# EAGLE board eagle_Ultrasonic sensor arduino (EAGLE 9.5.1)
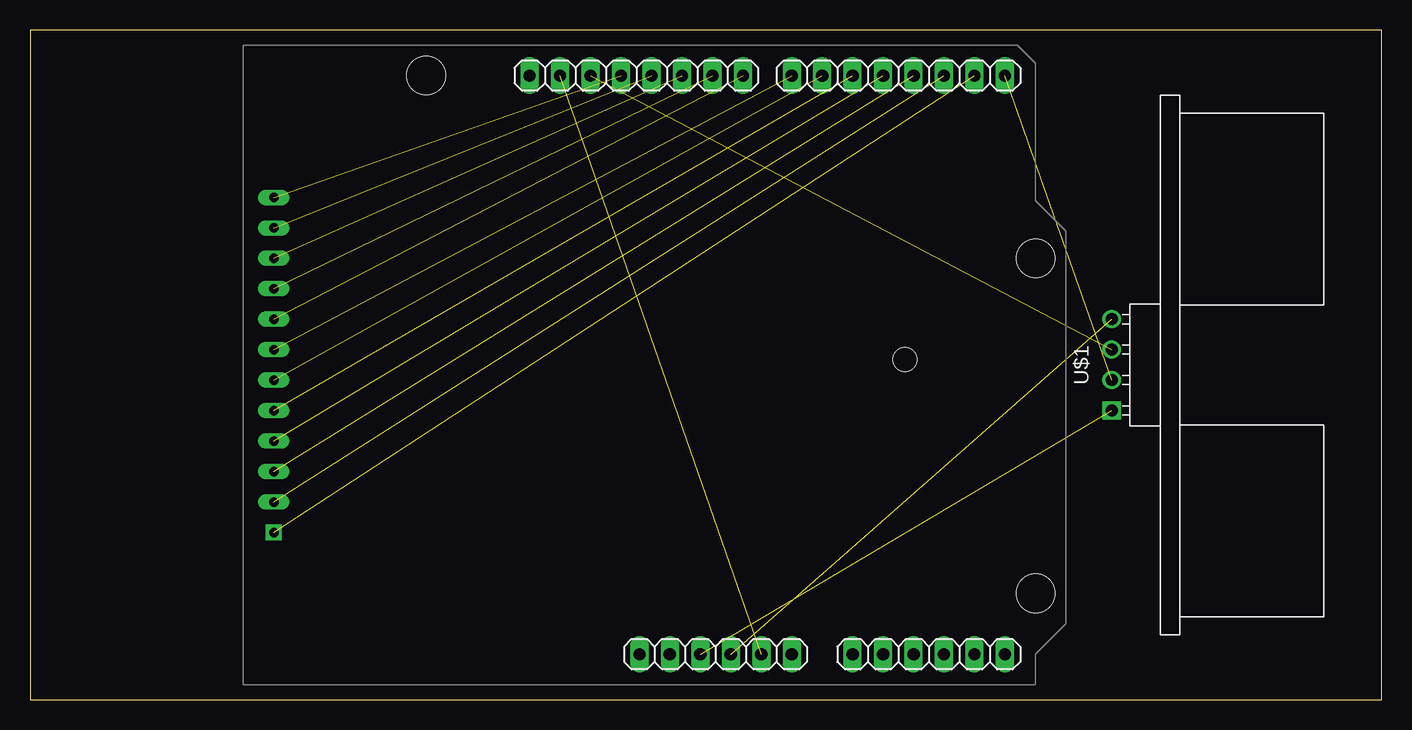
[diagram p0: board, top side]
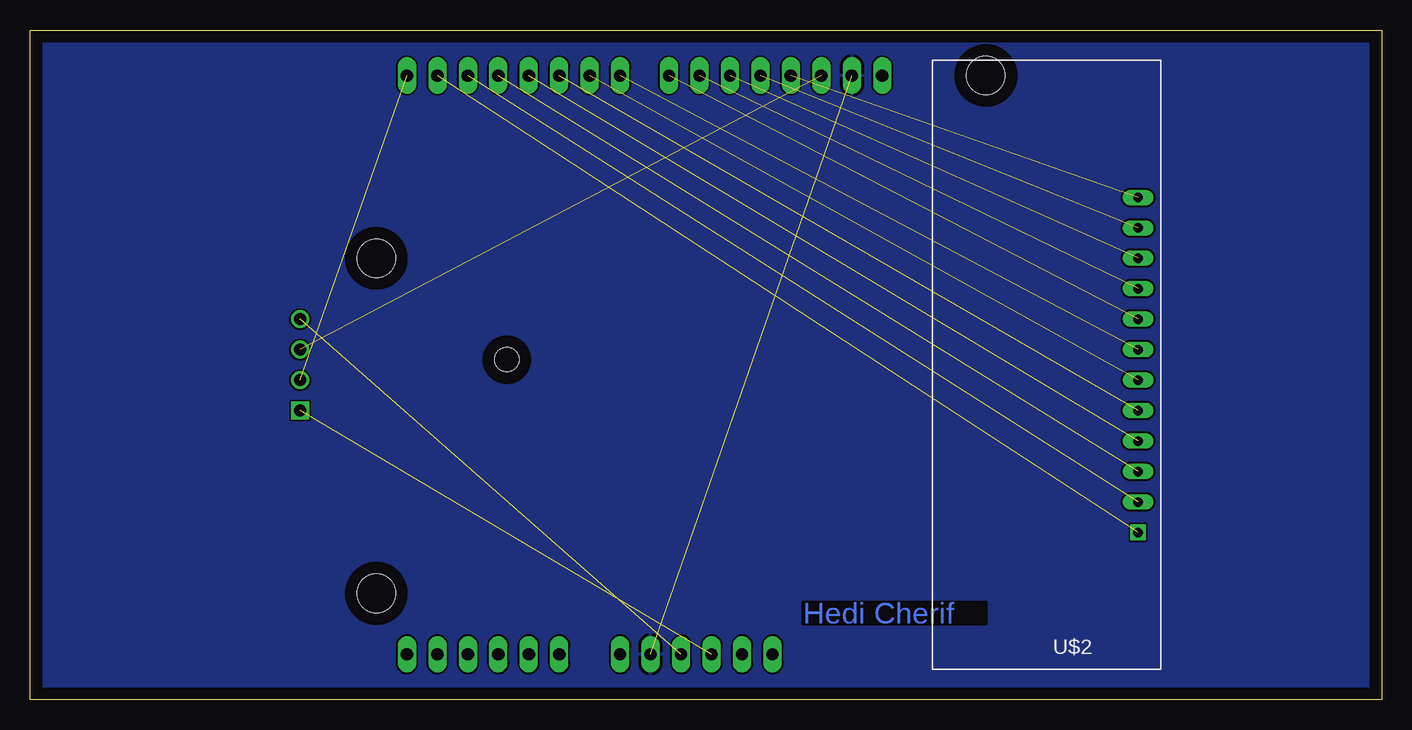
[diagram p1: board, bottom side, seen from below]

Size 112.7 x 55.87 mm. Coordinates in mm from the lower left corner, seen from the top.
Outline: 0,0 112.7,0 112.7,55.87 0,55.87 0,0
Copper layers (1*16): Top 0.035mm / dielectric 0.15mm / Bottom 0.035mm
Design rules "default": minimum track width 6mil, minimum drill 0.35mm, track to track 6mil, track to pad 6mil, pad to pad 6mil, via to via 6mil, smd to smd 6mil, copper to edge 40mil, drill to drill 6mil, minimum pad ring 10mil, minimum via ring 8mil, stop-mask expansion 4mil, vias tented up to drill 0mil, thermal gap 10mil

## Footprints (pad centres in the part's own frame; a part is rotated, then mirrored left to right if it is on the bottom)
ARDUINO2009 = drill 1.016 long: 1 33.02,2.54; 2 35.56,2.54; 3 38.1,2.54; 4 40.64,2.54; 5 43.18,2.54; 6 45.72,2.54; 7 50.8,2.54; 8 53.34,2.54; 9 55.88,2.54; 10 58.42,2.54; 11 60.96,2.54; 12 63.5,2.54; 13 63.5,50.8; 14 60.96,50.8; 15 58.42,50.8; 16 55.88,50.8; 17 53.34,50.8; 18 50.8,50.8; 19 48.26,50.8; 20 45.72,50.8; 21 41.656,50.8; 22 39.116,50.8; 23 36.576,50.8; 24 34.036,50.8; 25 31.496,50.8; 26 28.956,50.8; 27 26.416,50.8; 28 23.876,50.8 | hole 3.2: 15.24,50.8; 66.04,35.56; 66.04,7.62 | hole 2: 55.17,27.114
ULTRASONIC-HC-SR04#V = drill 1 square: 1 -3.81,0 | drill 1: 2 -1.27,0; 3 1.27,0; 4 3.81,0
NFD-5641 = drill 0.8 square: P$1 -13.97,-7.62 | drill 0.8 long: P$2 -11.43,-7.62; P$3 -8.89,-7.62; P$4 -6.35,-7.62; P$5 -3.81,-7.62; P$6 -1.27,-7.62; P$7 1.27,-7.62; P$8 3.81,-7.62; P$9 6.35,-7.62; P$10 8.89,-7.62; P$11 11.43,-7.62; P$12 13.97,-7.62

## Placement (x,y rotation side)
IC2  [ARDUINO2009]  17.78,1.27 0 top
U$1  ULTRASONIC-HC-SR04#V  [ULTRASONIC-HC-SR04#V]  90.17,27.94 90 top
U$2  KW4-563ASA  [NFD-5641]  27.94,27.94 90 bottom

## Library data of the parts
IC2 = arduino
U$1 = diy-modules
U$2 = KW4-563ASA

## Nets
+3V3: IC2.2
GND: IC2.5 IC2.27
N$1: IC2.24 U$2.P$11
N$2: IC2.20 U$2.P$7
N$3: IC2.17 U$2.P$4
N$4: IC2.15 U$2.P$2
N$5: IC2.14 U$2.P$1
N$6: IC2.23 U$2.P$10
N$7: IC2.18 U$2.P$5
N$8: IC2.16 U$2.P$3
N$9: IC2.25 U$2.P$12
N$10: IC2.22 U$2.P$9
N$11: IC2.21 U$2.P$8
N$12: IC2.19 U$2.P$6
N$13: IC2.4 U$1.4
N$14: IC2.3 U$1.1
N$15: IC2.13 U$1.2
N$16: IC2.26 U$1.3

## Tracks (layer width: path | path; a pad name or v marks a point on that pad's centre or on a via)
GND  (1 unrouted)
  pour Bottom: 0,55.88 113.03,55.88 113.03,0 0,0
N$1  (1 unrouted)
N$2  (1 unrouted)
N$3  (1 unrouted)
N$4  (1 unrouted)
N$5  (1 unrouted)
N$6  (1 unrouted)
N$7  (1 unrouted)
N$8  (1 unrouted)
N$9  (1 unrouted)
N$10  (1 unrouted)
N$11  (1 unrouted)
N$12  (1 unrouted)
N$13  (1 unrouted)
N$14  (1 unrouted)
N$15  (1 unrouted)
N$16  (1 unrouted)

## Text on the board
Bottom: Hedi Cherif